# Altium PCB BauhallenUhr_Variante_3.PcbDoc (part 2 of 2)
Units mm, origin at the board's own origin, x right, y up, seen from the top; angles counter-clockwise.
Board outline 93.98 x 68.58 mm, 4 copper layers (Top Layer, Signal Layer 2, GND Layer 3, Bottom Layer), stack 1.54 mm thick; 120 components, 80 nets, 567 pads, 100 vias.
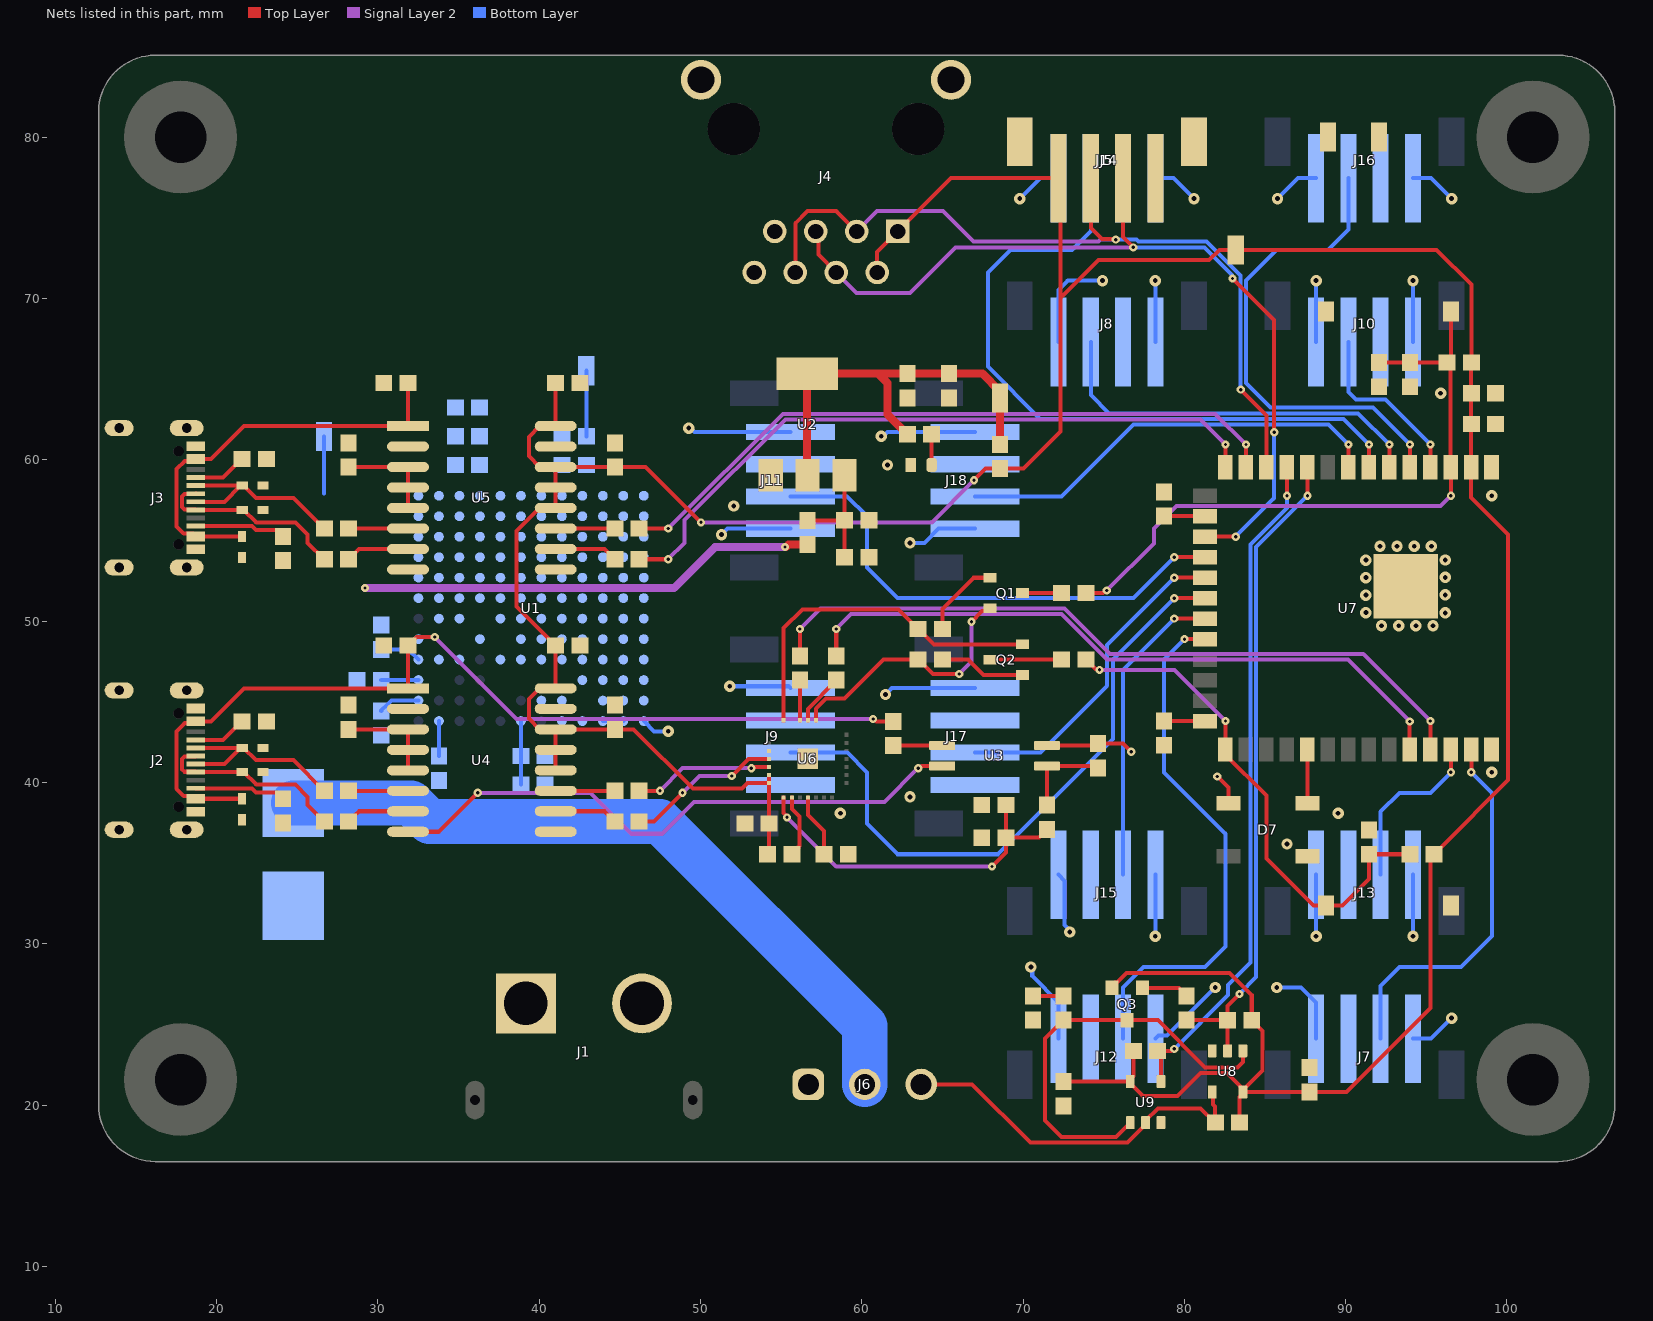
[diagram p4: the nets of this part, all layers, seen from the top]

## Part data
C1 C2 C3 C4 C5 C6 C7 C8 C9 C10 C11 C12 C13 C14 C15 C16 C17 C18 C19 C20 C21 C22 C23 C24 C25 C26 C27 C28 C29: library part Capacitor, "0603"
D1 D2 D3 D4 D5 D6: library part ESD_Protection_Diode, ComponentLink1Description=Supplier, ComponentLink1URL=https://www.digikey.com/en/products/detail/onsemi/ESD5B5-0ST1G/1792206
F1: library part Fuse, "FUSE BRD MNT 10A 125VAC/VDC SMD"
J1: library part PCB_Connector, "Socket, DC supply, male, PIN: 2.", Package=Package, Check_prices=https://www.snapeda.com/parts/XT60PW-M/AMASS/view-part/?ref=eda, MF=AMASS, MP=XT60PW-M, SnapEDA_Link=https://www.snapeda.com/parts/XT60PW-M/AMASS/view-part/?ref=snap
J2 J3: "USB - C - Port"
J4: library part RJ45, "Jack Modular Connector 8p8c (RJ45, Ethernet) 90Â° Angle (Right) Shielded Cat3.", Package=None, Check_prices=https://www.snapeda.com/parts/RJE091884511C/Amphenol/view-part/?ref=eda, MF="Amphenol ICC (Commercial Products)", MP=RJE091884511C, SnapEDA_Link=https://www.snapeda.com/parts/RJE091884511C/Amphenol/view-part/?ref=snap, System=Connector
J5: library part Connector_SMD_Small_Symbol, "CONN HEADER SMD 4POS 2MM.", ComponentLink1Description=Supplier, ComponentLink1URL=https://www.digikey.ch/en/products/detail/jst-sales-america-inc/B4B-PH-SM4-TB/926643
J6: library part Screw_Connector, "691214110003 Wurth Elektronik"
J7 J8 J9 J10 J11 J12 J13 J14 J15 J16 J17 J18: library part Connector_SMD, "CONN HEADER SMD 4POS 2MM.", ComponentLink1Description=Supplier, ComponentLink1URL=https://www.digikey.ch/en/products/detail/jst-sales-america-inc/B4B-PH-SM4-TB/926643
LED1: library part "LED_0603, GREEN", "LED 0603, Green, 3.2 V, 20 mA, 430 mcd"
MEC1 MEC2 MEC3 MEC4: "Mounting Hole for M3 Screw, plated to connect signal"
Q1 Q2: library part NPN_Bipolar_Transistor, "SS8050 SOT - 23.", ComponentLink1Description=Supplier, ComponentLink1URL=https://www.digikey.com/en/products/detail/guangdong-inmark-electronics-co-ltd/SS8050/28539054
Q3: library part PNP_Bipolar_Transistor, "Bipolar (BJT) Transistor PNP 25 V 500 mA 150MHz 300 mW Surface Mount SOT-23."
R1 R2 R3 R4 R5 R6 R7 R8 R9 R10 R11 R12 R13 R14 R15 R16 R17 R18 R19 R20 R21 R22 R23 R24 R25 R26 R27 R28 R29 R30 R31 R32 R33 R34 R35 R36 R37 R38 R39 R40: library part Resistor, "0603"
S1 S2: library part Button
TP1 TP2 TP3 TP4 TP5 TP6: "Prüfstecker und Messbuchsen EZ BoardWare S27 SMT Mini Test Terminal, Reel"
U1: library part DCDC_Converter, "Module DC-DC 1-OUT 0.6V to 5V 15A Automotive 133-Pin BGA Tray.", Package="BGA -133 Analog Devices", Availability="In Stock", Check_prices=https://www.snapeda.com/parts/LTM4627EY%23PBF/Analog+Devices/view-part/?ref=eda, MF="Analog Devices", MP=LTM4627EY#PBF, Price=None, Purchase-URL=https://pricing.snapeda.com/search/part/LTM4627EY#PBF/?ref=eda, SnapEDA_Link=https://www.snapeda.com/parts/LTM4627EY%23PBF/Analog+Devices/view-part/?ref=snap
U2: "LDO, 3.3V and 800mA.", ComponentLink1Description=Datasheet, ComponentLink1URL=chrome-extension://efaidnbmnnnibpcajpcglclefindmkaj/https://www.st.com/content/ccc/resource/technical/document/datasheet/99/3b/7d/91/91/51/4b/be/CD00000544.pdf/files/CD00000544.pdf/jcr:content/translations/en.CD00000544.pdf, ComponentLink2Description=Supplier, ComponentLink2URL=https://www.digikey.ch/en/products/detail/stmicroelectronics/LD1117S33CTR/585765
U3: library part Optocoupler, "Optoisolator Transistor Output 3750Vrms 1 Channel 4-SO."
U4 U5: library part USB_Digital_Isolator, "DGT ISOL 2500VRMS 2CH USB 16SOIC."
U6: "USB to UART bridge.", ComponentLink1Description=Datasheet, ComponentLink1URL=chrome-extension://efaidnbmnnnibpcajpcglclefindmkaj/https://www.silabs.com/documents/public/data-sheets/cp2102n-datasheet.pdf, ComponentLink2Description=Supplierlink, ComponentLink2URL=https://www.digikey.ch/en/products/detail/silicon-laboratories-inc/CP2102N-A02-GQFN28R/9863486?utm_source=findchips&utm_medium=aggregator&utm_campaign=buynow
U7: library part ESP32-S3-WROOM-2-N32R16V, "Bluetooth, WiFi 802.11b/g/n, Bluetooth v5.0 Transceiver Module 2.4GHz PCB Trace Surface Mount", Manufacturer="Espressif Systems", Supplier 1 Part Number=1965-ESP32-S3-WROOM-2-N32R16VCT-ND, Supplier 2 Part Number=356-SP32S3WM2N32R16V, Assembly Technology=SMD, ComponentLink1Description="Show Datasheet on SMS Drive", ComponentLink1URL="P:\Electronic Workshop\Datasheets (Refered in Libraries - Don't Change!)\ESP32-S3-WROOM-2-N32R16V_Digikey_1965-ESP32-S3-WROOM-2-N32R16VCT-ND.pdf", Latest Revision Date=17.10.2025, Latest Revision Made By="Simon Gimple", Latest Revision Note="New Part", Manufacturer Part Number=ESP32-S3-WROOM-2-N32R16V, Supplier 1=DigiKey, Supplier 2=Mouser
U8: library part Single_Bus_Buffer_Gate, "Single Bus Buffer Gate With 3-State Outputs, DBV0005A, LARGE T&R.", ComponentLink1Description=Supplier, ComponentLink1URL=https://www.digikey.com/en/products/detail/texas-instruments/SN74LVC1G126DBVR/385722
U9: library part Single_Bus_Buffer_Gate_Inverted, "Single Bus Buffer Gate With 3-State Outputs, DBV0005A, LARGE T&R.", ComponentLink1Description=Supplier

## Via types
v1: diameter 0.508, hole 0.203, Top Layer to Bottom Layer, 52 vias
v2: diameter 0.7, hole 0.3, Top Layer to Bottom Layer, 32 vias
v3: diameter 0.7, hole 0.3, Top Layer to Bottom Layer, tented top, 16 vias

## Nets (pads, with @x,y where several pads share a name; then routed paths per layer and width w, separated by ;. In a path a pad name is that pad's centre, name@x,y a point inside that pad or via, vN(x,y) a via of type N, cw(c..) or ccw(c..) an arc to the next point about the centre after c; other vN are vias at no path point)
+3.3V: C18.1 C19.1 C20.2 C21.2 C22.2 C23.2 C24.2 C28.2 C29.2 J4.1 J4.2 J5.1 Q3.2 R6.2 R20.2 R27.2 R32.2 R38.2 R39.2 R40.2 TP6.1 U4.12 U4.13 U4.14 U4.16 U5.12 U5.13 U5.14 U5.16 U6.6 U6.7 U7.2 U8.5 U9.5 | length 239
  Top Layer w0.25: U4.12@41.027,40.765 U4.13@41.027,42.035 U4.14@41.027,43.305 ; C21.2@41.027,64.77 U5.16@41.027,62.105 40.039,62.105 39.37,61.436 39.37,60.234 40.039,59.565 U5.14@41.027,59.565 ; v1(50.038,56.134) 46.607,59.565 C19.1@44.704,59.565 U5.14@41.027,59.565 ; R20.2@54.165,35.56 54.265,35.66 C22.2@54.265,37.46 U6.7@54.265,39.967 ; U6.6@54.265,40.467 U6.7@54.265,39.967 ; J4.2@60.96,71.628 60.96,72.898 J4.1@62.23,74.168 65.532,77.47 J5.1@72.2,77.47 72.336,77.334 72.336,70.05 ; v1(66.956,58.744) 67.672,59.46 R6.2@68.58,59.46 70.02,59.46 72.336,61.776 72.336,70.05 ; C29.2@72.517,21.463 72.527,21.473 U9.5@76.647,21.473 ; Q3.2@75.377,27.273 75.702,27.598 75.829,27.598 76.425,28.194 82.804,28.194 84.177,26.821 R38.2@84.177,25.273 84.202,25.273 84.577,24.898 84.577,24.873 84.836,24.614 84.836,22.157 U8.5@83.627,20.948 ; R40.2@76.847,23.368 76.847,21.798 76.647,21.598 U9.5@76.647,21.473 ; R39.2@83.427,18.923 83.427,20.498 83.627,20.698 U8.5@83.627,20.823 ; C28.2@87.752,20.823 U8.5@83.627,20.823 ; C28.2@87.757,20.828 90.043,20.828 95.25,26.035 95.25,35.33 R32.2@95.48,35.56 ; R32.2@95.505,35.56 95.88,35.935 95.88,35.96 100.076,40.156 100.076,55.372 97.77,57.678 U7.2@97.77,59.55 97.77,66.02 R27.2@97.79,66.04 97.79,70.866 95.631,73.025 TP6.1@83.185,73.025 82.169,73.025 81.534,72.39 74.676,72.39 72.336,70.05 ; U4.14@41.027,43.305 40.039,43.305 39.37,43.974 39.37,45.176 40.039,45.845 U4.16@41.027,45.845 C20.2@41.027,48.51 41.002,48.51 40.627,48.885 40.627,48.91 38.608,50.929 38.608,55.594 40.039,57.025 U5.12@41.027,57.025 U5.13@41.027,58.295 U5.14@41.027,59.565 ; U4.14@41.027,43.305 C18.1@44.704,43.305 45.849,43.305 49.53,39.624 52.578,39.624 52.921,39.967 U6.7@54.265,39.967 ; U9.5@76.647,21.473 76.647,21.348 77.421,20.574 79.563,20.574 80.991,22.002 82.646,22.002 83.477,21.171 83.477,21.098 83.554,21.021 83.627,21.021 U8.5@83.627,20.948 ; U8.5@83.627,20.823 U8.5@83.627,20.948
  Signal Layer 2 w0.25: v1(50.038,56.134) 64.346,56.134 v1(66.956,58.744)
+5V: C1.2 C8.2 C10.2 D7.1 J7.2 J8.2 J9.2 J10.2 J11.2 J12.2 J13.2 J14.2 J15.2 J16.2 J17.2 J18.2 R18.2 TP3.1 U1.J1 U1.J2 U1.J3 U1.J4 U1.J5 U1.J6 U1.J7 U1.J8 U1.J9 U1.J10 U1.J12 U1.K1 U1.K2 U1.K3 U1.K4 U1.K5 U1.K6 U1.K7 U1.K8 U1.K9 U1.K10 U1.K11 U1.L1 U1.L2 U1.L3 U1.L4 U1.L5 U1.L6 U1.L7 U1.L8 U1.L9 U1.L10 U1.L11 U1.M1 U1.M2 U1.M3 U1.M4 U1.M5 U1.M6 U1.M7 U1.M8 U1.M9 U1.M10 U1.M11 U3.4 | length 11.5
  Top Layer w0.25: U3.4@71.482,42.299 74.542,42.299 R18.2@74.657,42.414 76.204,42.414 v1(76.708,41.91) ; v1(82.042,40.386) 82.73,39.698 D7.1@82.73,38.735
  Bottom Layer w0.25: C8.2@42.926,61.468 TP3.1@42.926,65.532
+12V: C9.2 C11.2 C12.2 F1.2 J6.2 R2.1 R3.2 TP1.1 U1.A1 U1.A2 U1.A3 U1.A4 U1.A5 U1.A6 U1.B1 U1.B2 U1.B3 U1.B4 U1.B5 U1.B6 U1.C1 U1.C2 U1.C3 U1.C4 U1.C5 U1.C6 | length 76.9
  Top Layer w0.5: v1(55.245,54.61) 55.315,54.61 55.454,54.749 R2.1@56.642,54.749
  Signal Layer 2 w0.5: v1(29.21,52.07) 48.376,52.07 50.916,54.61 v1(55.245,54.61)
  Bottom Layer w0.25: 26.67,57.912 TP1.1@26.67,61.468
  Bottom Layer w2.8: F1.2@24.765,38.735 32.053,38.735 33.196,37.592 47.498,37.592 60.187,24.903 J6.2@60.187,21.29
D1: J7.3 U7.39 | length 23.5
  Top Layer w0.25: U7.39@97.77,42.05 97.79,42.03 v1(97.79,40.64)
  Bottom Layer w0.25: J7.3@92.17,24.13 92.17,27.4 93.345,28.575 97.155,28.575 99.06,30.48 99.06,39.37 v1(97.79,40.64)
D2: J13.3 U7.38 | length 10.7
  Top Layer w0.25: U7.38@96.5,42.05 96.52,42.03 v1(96.52,40.64)
  Bottom Layer w0.25: J13.3@92.17,34.29 92.17,38.195 93.345,39.37 95.25,39.37 v1(96.52,40.64)
D3: J10.3 U7.4 | length 10.9
  Top Layer w0.25: U7.4@95.23,59.55 95.25,59.57 v1(95.25,60.96)
  Bottom Layer w0.25: J10.3@90.17,67.31 90.17,64.225 90.641,63.754 92.456,63.754 v1(95.25,60.96)
D4: J16.3 U7.5 | length 30.3
  Top Layer w0.25: U7.5@93.96,59.55 93.98,59.57 v1(93.98,60.96)
  Bottom Layer w0.25: J16.3@90.17,77.47 90.17,74.295 88.9,73.025 85.725,73.025 83.82,71.12 83.82,64.77 85.344,63.246 91.694,63.246 v1(93.98,60.96)
D5: J8.3 U7.6 | length 24.5
  Top Layer w0.25: U7.6@92.69,59.55 92.71,59.57 v1(92.71,60.96)
  Bottom Layer w0.25: J8.3@74.2,67.31 74.2,64.04 75.344,62.896 90.774,62.896 v1(92.71,60.96)
D6: J14.3 U7.7 | length 43.6
  Top Layer w0.25: U7.7@91.42,59.55 91.44,59.57 v1(91.44,60.96)
  Bottom Layer w0.25: J14.3@74.2,77.47 74.2,74.2 73.025,73.025 69.215,73.025 67.818,71.628 67.818,65.786 71.058,62.546 89.854,62.546 v1(91.44,60.96)
D7: J11.3 U7.18 | length 31.2
  Top Layer w0.25: v1(79.375,53.975) U7.18@81.28,53.975
  Bottom Layer w0.25: J11.3@55.59,57.74 59.1,57.74 60.325,56.515 60.325,53.34 62.23,51.435 76.835,51.435 v1(79.375,53.975)
D8: J17.3 U7.19 | length 20.2
  Top Layer w0.25: v1(79.375,52.705) U7.19@81.28,52.705
  Bottom Layer w0.25: J17.3@67.02,41.86 71.07,41.86 75.215,46.005 75.215,48.545 v1(79.375,52.705)
D9: J9.3 U7.20 | length 39.6
  Top Layer w0.25: v1(79.375,51.435) U7.20@81.28,51.435
  Bottom Layer w0.25: J9.3@55.59,41.86 59.105,41.86 60.325,40.64 60.325,37.465 62.23,35.56 68.434,35.56 75.565,42.691 75.565,47.625 v1(79.375,51.435)
D10: J15.3 U7.21 | length 19.1
  Top Layer w0.25: v1(79.375,50.165) U7.21@81.28,50.165
  Bottom Layer w0.25: J15.3@76.2,34.29 76.2,46.99 v1(79.375,50.165)
D11: J12.3 U7.22 | length 33
  Top Layer w0.25: v1(80.01,48.895) U7.22@81.28,48.895
  Bottom Layer w0.25: J12.3@76.2,24.13 76.2,27.305 77.47,28.575 81.28,28.575 82.55,29.845 82.55,36.83 78.74,40.64 78.74,47.625 v1(80.01,48.895)
D12: J18.3 U7.8 | length 26.9
  Top Layer w0.25: U7.8@90.15,59.55 90.17,59.57 v1(90.17,60.96)
  Bottom Layer w0.25: J18.3@67.02,57.74 72.379,57.74 76.835,62.196 88.934,62.196 v1(90.17,60.96)
DATA: J6.3 R39.1 U8.4 U9.2 | length 23.1
  Top Layer w0.25: J6.3@63.687,21.29 66.848,21.29 70.454,17.684 76.483,17.684 77.597,18.798 U9.2@77.597,18.923 77.597,19.048 78.361,19.812 81.013,19.812 81.902,18.923 81.902,19.911 81.764,20.048 81.764,20.786 U8.4@81.727,20.823
DTR: Q2.2 R28.2 U6.28 | length 21.9
  Top Layer w0.25: U6.28@55.165,43.867 55.165,49.577 56.328,50.74 62.29,50.74 63.1,49.93 63.1,49.905 63.475,49.53 R28.2@63.5,49.53 63.525,49.53 64.48,48.575 Q2.2@69.965,48.575
EN: C25.2 C26.2 R27.1 R30.2 S1.2 U7.3 | length 41.5
  Top Layer w0.25: R30.2@73.89,51.75 74.95,51.75 75.114,51.914 v1(75.184,51.914) ; C25.2@92.075,66.04 C26.2@93.98,66.04 R27.1@96.29,66.04 ; v1(96.52,57.785) 96.52,59.53 U7.3@96.5,59.55 96.5,65.83 R27.1@96.29,66.04 ; S1.2@96.52,69.215 96.52,66.27 R27.1@96.29,66.04
  Signal Layer 2 w0.25: v1(75.184,51.914) 78.105,54.835 78.105,55.753 79.502,57.15 95.885,57.15 v1(96.52,57.785)
GND: C2.1 C3.1 C4.1 C5.1 C6.1 C7.1 C8.1 C9.1 C10.1 C11.1 C12.1 C15.2 C18.2 C19.2 C20.1 C21.1 C22.1 C23.1 C24.1 C25.1 C26.1 C27.1 C28.1 C29.1 D7.3 J1.2 J4.7 J4.8 J4.SH1 J4.SH2 J5.4 J5.SH1 J5.SH2 J6.1 J7.1 J7.4 J8.1 J8.4 J9.1 J9.4 J10.1 J10.4 J11.1 J11.4 J12.1 J12.4 J13.1 J13.4 J14.1 J14.4 J15.1 J15.4 J16.1 J16.4 J17.1 J17.4 J18.1 J18.4 LED1.K R1.1 R4.1 R13.1 R26.1 R33.2 R34.2 R37.1 S1.1 S2.1 TP4.1 TP5.1 U1.A8 U1.B7 U1.B9 U1.C7 U1.C9 U1.D1 U1.D2 U1.D3 U1.D4 U1.D5 U1.D6 U1.D8 U1.E1 U1.E2 U1.E3 U1.E4 U1.E5 U1.E6 U1.E7 U1.E9 U1.F1 U1.F2 U1.F3 U1.F4 U1.F5 U1.F6 U1.F7 U1.F8 U1.F9 U1.G1 U1.G2 U1.G3 U1.G4 U1.G5 U1.G6 U1.G7 U1.G8 U1.G9 U1.G11 U1.H1 U1.H2 U1.H3 U1.H4 U1.H5 U1.H6 U1.H7 U1.H8 U1.H9 U1.H11 U1.H12 U1.M12 U2.1 U4.9 U4.15 U5.9 U5.15 U6.3 U6.29 U7.1 U7.40 U7.41 U8.3 U9.3 | length 95.3
  Bottom Layer w0.25: U1.M12@46.49,43.815 47.125,43.18 v2(48.006,43.18) ; v2(49.276,61.976) 49.398,61.976 49.634,61.74 J11.1@55.59,61.74 ; v2(51.308,55.372) 51.311,55.372 51.679,55.74 J11.4@55.59,55.74 ; v2(51.816,45.974) 55.476,45.974 J9.1@55.59,45.86 ; v2(61.214,61.468) 61.336,61.468 61.608,61.74 J18.1@67.02,61.74 ; v2(61.468,45.466) 61.862,45.86 J17.1@67.02,45.86 ; v2(62.992,54.864) 63.894,54.864 64.77,55.74 J18.4@67.02,55.74 ; v2(69.8,76.2) 71.07,77.47 J14.4@72.2,77.47 ; v2(70.485,28.575) 70.571,28.489 70.571,28.009 72.2,26.38 J12.1@72.2,24.13 ; J15.1@72.2,34.29 72.575,33.915 72.575,31.179 72.898,30.856 v2(72.898,30.734) ; J8.4@72.2,67.31 72.2,70.548 72.772,71.12 v2(74.93,71.12) ; J12.4@78.2,24.13 78.389,24.319 78.929,24.319 v2(81.915,27.305) ; v2(78.2,30.48) J15.4@78.2,34.29 ; J8.1@78.2,67.31 v2(78.2,71.12) ; J14.1@78.2,77.47 79.33,77.47 v2(80.6,76.2) ; v2(85.725,27.305) 87.245,27.305 88.17,26.38 J7.1@88.17,24.13 ; v2(85.77,76.2) 87.04,77.47 J16.4@88.17,77.47 ; v2(88.17,30.48) J13.1@88.17,34.29 ; J10.4@88.17,67.31 v2(88.17,71.12) ; J7.4@94.17,24.13 95.3,24.13 v2(96.57,25.4) ; v2(94.17,30.48) J13.4@94.17,34.29 ; J10.1@94.17,67.31 v2(94.17,71.12) ; J16.1@94.17,77.47 95.3,77.47 v2(96.57,76.2)
  other v2: 86.36,36.195 58.674,38.1 89.535,38.1 62.992,39.116 99.06,40.64 52.07,57.15 99.06,57.785 61.595,59.69 95.885,64.135
  other v3: 92.226,49.723 93.288,49.723 94.35,49.723 95.412,49.723 91.25,50.539 96.175,50.523 91.25,51.623 96.175,51.639 91.25,52.707 96.175,52.723 91.25,53.791 96.175,53.807 92.125,54.648 93.187,54.648 94.249,54.648 95.311,54.648
GND_A: C13.1 C16.2 D1.A D3.A D5.A J2.A1_B12 J2.B1_A12 J2.SH1 J2.SH2 J2.SH3 J2.SH4 R7.2 R8.2 U3.2 U4.2 U4.8 | length 36.9
  Top Layer w0.25: U4.8@31.871,36.955 33.78,36.955 v1(36.195,39.37) ; v1(63.5,40.894) 63.57,40.894 63.705,41.029 U3.2@64.982,41.029
  Signal Layer 2 w0.25: v1(36.195,39.37) 43.18,39.37 45.72,36.83 47.625,36.83 49.6,38.805 61.411,38.805 v1(63.5,40.894)
GND_B: C14.1 C17.2 D2.A D4.A D6.A J3.A1_B12 J3.B1_A12 J3.SH1 J3.SH2 J3.SH3 J3.SH4 R9.2 R10.2 U5.2 U5.8
GPIO0: C27.2 R31.2 R32.1 S2.2 U7.27 | length 32.1
  Top Layer w0.25: R31.2@73.89,47.625 73.915,47.625 74.501,47.039 74.687,47.039 v1(74.736,46.99) ; v1(82.55,43.815) 82.55,42.07 U7.27@82.53,42.05 82.53,41.75 85.09,39.19 85.09,35.306 88.011,32.385 S2.2@88.77,32.385 89.789,32.385 91.44,34.036 C27.2@91.44,35.56 R32.1@93.98,35.56
  Signal Layer 2 w0.25: v1(74.736,46.99) 79.375,46.99 v1(82.55,43.815)
GPIO19: D4.K J3.A7 J3.B7 R16.1 | length 12.3
  Top Layer w0.25: J3.A7@18.725,57.41 20.49,57.41 21.49,58.41 D4.K@21.59,58.41 ; J3.B7@18.725,58.41 D4.K@21.59,58.41 ; R16.1@26.694,55.755 26.669,55.755 24.766,57.658 22.442,57.658 21.69,58.41 D4.K@21.59,58.41
GPIO19_2: R24.2 U7.13 | length 42.8
  Top Layer w0.25: R24.2@46.204,55.755 v1(48.006,55.755) ; U7.13@83.8,59.55 83.82,59.57 v1(83.82,60.96)
  Signal Layer 2 w0.25: v1(48.006,55.755) 55.116,62.865 81.915,62.865 v1(83.82,60.96)
GPIO20: D6.K J3.A6 J3.B6 R17.1 | length 12
  Top Layer w0.25: J3.A6@18.725,57.91 18.7,57.885 18.022,57.885 17.876,57.739 17.876,57.081 18.022,56.935 18.7,56.935 J3.B6@18.725,56.91 D6.K@21.59,56.91 21.69,56.91 22.466,56.134 24.892,56.134 25.654,55.372 25.654,54.863 26.669,53.848 R17.1@26.694,53.848
GPIO20_2: R25.2 U7.14 | length 42.8
  Top Layer w0.25: R25.2@46.204,53.848 v1(48.006,53.848) ; U7.14@82.53,59.55 82.55,59.57 v1(82.55,60.96)
  Signal Layer 2 w0.25: v1(48.006,53.848) 49.022,54.864 49.022,56.276 55.261,62.515 80.995,62.515 v1(82.55,60.96)
NetC1_1: C1.1 R1.2 U1.F12 | length 3.9
  Bottom Layer w0.25: R1.2@38.87,39.878 C1.1@38.87,41.644 U1.F12@38.87,43.815
NetC2_2: C2.2 C3.2 R2.2 U2.3 | length 7.4
  Top Layer w0.25: R2.2@56.642,56.249 58.928,56.249 C2.2@58.94,56.261 ; U2.3@58.928,59.055 58.94,59.043 C2.2@58.94,56.261 ; C3.2@58.94,53.975 C2.2@58.94,56.261
NetC4_2: C4.2 C6.2 R5.2 R6.1 TP2.1 U2.2 U2.4 | length 26.6
  Top Layer w0.5: U2.2@56.642,59.055 56.617,59.08 U2.4@56.617,65.354 61.011,65.354 ; R5.2@62.83,61.595 62.805,61.595 62.555,61.845 62.555,61.87 61.595,62.83 61.595,64.77 61.011,65.354 ; R6.1@68.58,60.96 TP2.1@68.58,63.854 68.58,64.254 67.48,65.354 C6.2@65.405,65.354 C4.2@62.83,65.354 61.011,65.354
NetC5_2: C5.2 U1.A9 | length 2.6
  Bottom Layer w0.25: C5.2@30.214,48.26 31.885,48.26 U1.A9@32.52,47.625
NetC7_2: C7.2 U1.A11 | length 2.6
  Bottom Layer w0.25: C7.2@30.214,44.438 30.214,44.463 30.589,44.838 30.614,44.838 30.861,45.085 U1.A11@32.52,45.085
NetC15_1: C15.1 R12.1 R13.2 U6.8 | length 22.2
  Top Layer w0.25: U6.8@55.165,39.067 55.165,38.123 55.372,37.916 v1(55.372,37.846) ; v1(68.072,34.798) 68.942,35.668 R13.2@68.942,36.584 ; C15.1@68.942,38.604 R13.2@68.942,36.584 ; R12.1@71.482,37.104 71.482,37.079 70.987,36.584 R13.2@68.942,36.584
  Signal Layer 2 w0.25: v1(55.372,37.846) 58.42,34.798 v1(68.072,34.798)
NetC16_1: C16.1 U4.3 U4.4 U4.5 | length 6.2
  Top Layer w0.25: C16.1@28.194,43.305 U4.3@31.871,43.305 U4.5@31.871,40.765
NetC17_1: C17.1 U5.3 U5.4 U5.5 | length 6.2
  Top Layer w0.25: C17.1@28.194,59.565 U5.3@31.871,59.565 U5.5@31.871,57.025
NetD7_4: D7.4 U7.31 | length 3.3
  Top Layer w0.25: U7.31@87.61,42.05 87.63,42.03 D7.4@87.63,38.735
NetF1_1: F1.1 J1.1
NetJ2_A5: J2.A5 R8.1 | length 3.3
  Top Layer w0.25: J2.A5@18.725,42.65 20.415,42.65 21.565,43.8 R8.1@21.59,43.8
NetJ2_B5: J2.B5 R7.1 | length 5.7
  Top Layer w0.25: J2.B5@18.725,39.65 22.195,39.65 22.445,39.4 23.755,39.4 24.13,39.025 R7.1@24.13,39
NetJ3_A5: J3.A5 R10.1 | length 3.3
  Top Layer w0.25: J3.A5@18.725,58.91 20.415,58.91 21.565,60.06 R10.1@21.59,60.06
NetJ3_B5: J3.B5 R9.1 | length 5.7
  Top Layer w0.25: J3.B5@18.725,55.91 22.195,55.91 22.445,55.66 23.755,55.66 24.13,55.285 R9.1@24.13,55.26
NetLED1_A: LED1.A R5.1 | length 1.9
  Top Layer w0.25: LED1.A@64.33,59.69 R5.1@64.33,61.595
NetQ1_1: Q1.1 R28.1 | length 5
  Top Layer w0.25: R28.1@65,49.53 65,50.776 66.924,52.7 Q1.1@67.945,52.7
NetQ1_3: Q1.3 R30.1 | length 2.4
  Top Layer w0.25: Q1.3@69.965,51.75 R30.1@72.39,51.75
NetQ2_1: Q2.1 R29.1 | length 5.4
  Top Layer w0.25: R29.1@65,47.625 66.602,47.625 67.552,46.675 Q2.1@69.965,46.675
NetQ2_3: Q2.3 R31.1 | length 4.4
  Top Layer w0.25: Q2.3@67.945,47.625 R31.1@72.39,47.625
NetQ3_1: Q3.1 R35.1 | length 3
  Top Layer w0.25: Q3.1@77.404,27.273 79.662,27.273 80.137,26.798 R35.1@80.137,26.773
NetR3_1: R3.1 U1.A10 | length 2.3
  Bottom Layer w0.25: R3.1@30.214,46.355 U1.A10@32.52,46.355
NetR4_2: R4.2 U1.B12 | length 2.2
  Bottom Layer w0.25: R4.2@33.79,41.644 U1.B12@33.79,43.815
NetR11_1: R11.1 U3.1 | length 3
  Top Layer w0.25: R11.1@61.957,42.299 U3.1@64.982,42.299
NetR12_2: R12.2 R18.1 U3.3 | length 5.6
  Top Layer w0.25: R12.2@71.482,38.604 U3.3@71.482,41.029 74.542,41.029 R18.1@74.657,40.914
NetR14_2: R14.2 U4.6 | length 3.7
  Top Layer w0.25: R14.2@28.194,39.495 U4.6@31.871,39.495
NetR15_2: R15.2 U4.7 | length 4
  Top Layer w0.25: R15.2@28.194,37.588 28.219,37.588 28.594,37.963 28.594,37.988 28.831,38.225 U4.7@31.871,38.225
NetR16_2: R16.2 U5.6 | length 3.7
  Top Layer w0.25: R16.2@28.194,55.755 U5.6@31.871,55.755
NetR17_2: R17.2 U5.7 | length 4
  Top Layer w0.25: R17.2@28.194,53.848 28.219,53.848 28.594,54.223 28.594,54.248 28.831,54.485 U5.7@31.871,54.485
NetR19_2: R19.2 U6.25 | length 3.2
  Top Layer w0.25: U6.25@56.665,43.867 56.665,44.575 58.42,46.33 R19.2@58.42,46.355
NetR20_1: R20.1 U6.9 | length 3.9
  Top Layer w0.25: R20.1@55.665,35.56 55.69,35.56 56.065,35.935 56.065,36.012 56.134,36.081 56.134,37.896 55.665,38.365 U6.9@55.665,39.067
NetR21_2: R21.2 U6.26 | length 2.5
  Top Layer w0.25: U6.26@56.165,43.867 R21.2@56.165,46.355
NetR22_1: R22.1 U4.11 | length 3.7
  Top Layer w0.25: U4.11@41.027,39.495 R22.1@44.704,39.495
NetR23_1: R23.1 U4.10 | length 3.9
  Top Layer w0.25: U4.10@41.027,38.225 44.042,38.225 44.679,37.588 R23.1@44.704,37.588
NetR24_1: R24.1 U5.11 | length 3.7
  Top Layer w0.25: U5.11@41.027,55.755 R24.1@44.704,55.755
NetR25_1: R25.1 U5.10 | length 3.9
  Top Layer w0.25: U5.10@41.027,54.485 44.042,54.485 44.679,53.848 R25.1@44.704,53.848
NetR26_2: R26.2 U6.11 | length 3.9
  Top Layer w0.25: U6.11@56.665,39.067 56.665,38.001 57.665,37.001 R26.2@57.665,35.56
NetR33_1: R33.1 U7.26 | length 2.5
  Top Layer w0.25: R33.1@78.74,43.815 U7.26@81.28,43.815
NetR34_1: R34.1 U7.16 | length 2.5
  Top Layer w0.25: R34.1@78.74,56.515 U7.16@81.28,56.515
NetR36_1: R36.1 R37.2 | length 1.9
  Top Layer w0.25: R37.2@70.612,26.773 R36.1@72.517,26.773
RTS: Q1.2 R29.2 U6.24 | length 16.3
  Top Layer w0.25: U6.24@57.165,43.867 57.165,44.58 57.797,45.212 58.928,45.212 61.341,47.625 R29.2@63.5,47.625 63.525,47.625 64.414,46.736 v1(66.04,46.736) ; v1(66.802,49.971) 67.456,50.625 67.77,50.625 Q1.2@67.945,50.8
  Signal Layer 2 w0.25: v1(66.04,46.736) 66.802,47.498 v1(66.802,49.971)
SCL: J4.4 J4.5 J5.3 U7.17 | length 54.8
  Top Layer w0.25: J4.5@57.15,74.168 57.311,74.007 57.311,72.737 J4.4@58.42,71.628 ; J5.3@76.2,77.47 76.2,73.816 v1(76.835,73.181) ; U7.17@81.28,55.245 v1(83.185,55.245) ; v1(82.991,71.247) 85.569,68.669 v1(85.569,61.717)
  Signal Layer 2 w0.25: J4.4@58.42,71.628 59.69,70.358 62.992,70.358 65.815,73.181 v1(76.835,73.181)
  Bottom Layer w0.25: v1(76.835,73.181) 81.239,73.181 82.942,71.479 82.942,71.296 v1(82.991,71.247) ; v1(83.185,55.245) 85.569,57.629 v1(85.569,61.717)
SDA: J4.3 J4.6 J5.2 U7.12 | length 51.3
  Top Layer w0.25: J4.6@55.88,71.628 55.88,74.676 56.642,75.438 58.42,75.438 J4.3@59.69,74.168 ; J5.2@74.2,77.47 74.2,74.39 74.881,73.709 75.698,73.709 v1(75.747,73.66) ; v1(83.496,64.362) 85.09,62.768 85.09,59.57 U7.12@85.07,59.55
  Signal Layer 2 w0.25: J4.3@59.69,74.168 60.96,75.438 65.024,75.438 66.931,73.531 74.684,73.531 74.813,73.66 v1(75.747,73.66)
  Bottom Layer w0.25: v1(75.747,73.66) 77.033,73.66 77.162,73.531 81.384,73.531 83.47,71.445 83.47,64.388 v1(83.496,64.362)
TX_EN: Q3.3 R36.2 U8.1 U9.1 | length 25.9
  Top Layer w0.25: U9.1@76.647,18.923 75.758,18.034 72.39,18.034 71.374,19.05 71.374,24.13 72.117,24.873 72.142,24.873 72.517,25.248 R36.2@72.517,25.273 78.359,25.273 81.28,22.352 83.285,22.352 83.627,22.694 U8.1@83.627,23.373
U0_RXD: R19.1 U7.36 | length 42.1
  Top Layer w0.25: R19.1@58.42,47.855 v1(58.42,49.53) ; U7.36@93.96,42.05 93.96,43.775 v1(93.973,43.788)
  Signal Layer 2 w0.25: v1(58.42,49.53) 59.34,50.45 72.39,50.45 75.215,47.625 90.135,47.625 v1(93.973,43.788)
U0_TXD: R21.1 U7.37 | length 46
  Top Layer w0.25: R21.1@56.165,47.855 v1(56.165,49.53) ; U7.37@95.23,42.05 95.25,42.07 v1(95.25,43.815)
  Signal Layer 2 w0.25: v1(56.165,49.53) 57.435,50.8 72.57,50.8 75.395,47.975 91.09,47.975 v1(95.25,43.815)
U1_RXD: R40.1 U7.11 U9.4 | length 42
  Top Layer w0.25: U9.4@78.547,21.473 78.547,23.168 R40.1@78.347,23.368 79.178,23.368 79.305,23.495 v1(79.375,23.495) ; U7.11@86.34,59.55 86.36,59.53 v1(86.36,57.785)
  Bottom Layer w0.25: v1(79.375,23.495) 82.706,26.826 82.706,27.461 84.105,28.86 84.105,54.755 86.36,57.01 v1(86.36,57.785)
U1_TXD: R35.2 R38.1 U7.10 U8.2 | length 40.8
  Top Layer w0.25: R35.2@80.137,25.273 R38.1@82.677,25.273 ; U8.2@82.677,23.373 R38.1@82.677,25.273 ; v1(83.418,26.903) 82.677,26.162 R38.1@82.677,25.273 ; U7.10@87.61,59.55 87.63,59.53 v1(87.63,57.785)
  Bottom Layer w0.25: v1(83.418,26.903) 84.455,27.94 84.455,54.61 v1(87.63,57.785)
USB_DN: D3.K J2.A7 J2.B7 R14.1 | length 12.3
  Top Layer w0.25: J2.A7@18.725,41.15 20.49,41.15 21.49,42.15 D3.K@21.59,42.15 ; J2.B7@18.725,42.15 D3.K@21.59,42.15 ; R14.1@26.694,39.495 26.669,39.495 24.766,41.398 22.442,41.398 21.69,42.15 D3.K@21.59,42.15
USB_DN_2: R22.2 U6.5 | length 8.7
  Top Layer w0.25: R22.2@46.204,39.495 v1(47.498,39.495) ; v1(53.16,40.894) 53.229,40.894 53.302,40.967 U6.5@54.265,40.967
  Signal Layer 2 w0.25: v1(47.498,39.495) 48.897,40.894 v1@53.163,40.894
USB_DP: D5.K J2.A6 J2.B6 R15.1 | length 12
  Top Layer w0.25: J2.A6@18.725,41.65 18.7,41.625 18.022,41.625 17.876,41.479 17.876,40.821 18.022,40.675 18.7,40.675 J2.B6@18.725,40.65 D5.K@21.59,40.65 21.69,40.65 22.466,39.874 24.892,39.874 25.654,39.112 25.654,38.603 26.669,37.588 R15.1@26.694,37.588
USB_DP_2: R23.2 U6.4 | length 9.7
  Top Layer w0.25: R23.2@46.204,37.588 46.208,37.592 47.117,37.592 v1(48.895,39.37) ; v1(51.943,40.415) 52.995,41.467 U6.4@54.265,41.467
  Signal Layer 2 w0.25: v1(48.895,39.37) 49.94,40.415 v1(51.943,40.415)
VBUS_A: C13.2 D1.K J2.A4_B9 J2.B4_A9 R11.2 U4.1 | length 58.5
  Top Layer w0.25: D1.K@21.59,39 J2.B4_A9@18.725,39 18.55,39.175 17.971,39.175 17.526,39.62 17.526,43.176 18.034,43.684 18.609,43.684 J2.A4_B9@18.725,43.8 19.674,43.8 21.719,45.845 U4.1@31.871,45.845 C13.2@31.871,48.51 31.896,48.51 32.408,49.022 v1(33.528,49.022) ; v1(60.706,43.942) 60.776,43.942 60.919,43.799 R11.2@61.957,43.799
  Signal Layer 2 w0.25: v1(33.528,49.022) 38.608,43.942 v1(60.706,43.942)
VBUS_B: C14.2 D2.K J3.A4_B9 J3.B4_A9 U5.1 | length 26
  Top Layer w0.25: D2.K@21.59,55.26 J3.B4_A9@18.725,55.26 18.55,55.435 17.971,55.435 17.526,55.88 17.526,59.436 18.034,59.944 18.609,59.944 J3.A4_B9@18.725,60.06 19.674,60.06 21.719,62.105 U5.1@31.871,62.105 C14.2@31.871,64.77
VOUT_LCL: U1.K12 U1.L12 | length 1.3
  Bottom Layer w0.25: U1.K12@43.95,43.815 U1.L12@45.22,43.815
pads on no net: D7.2 J1.SH1 J1.SH2 J2. J2.A8 J2.B8 J3. J3.A8 J3.B8 J4. J7.SH1 J7.SH2 J8.SH1 J8.SH2 J9.SH1 J9.SH2 J10.SH1 J10.SH2 J11.SH1 J11.SH2 J12.SH1 J12.SH2 J13.SH1 J13.SH2 J14.SH1 J14.SH2 J15.SH1 J15.SH2 J16.SH1 J16.SH2 J17.SH1 J17.SH2 J18.SH1 J18.SH2 MEC1.1 MEC2.1 MEC3.1 MEC4.1 U1.A7 U1.A12 U1.B11 U1.C10 U1.C11 U1.C12 U1.D9 U1.D10 U1.D11 U1.D12 U1.E12 U1.F11 U1.G12 U6.1 U6.2 U6.10 U6.12 U6.13 U6.14 U6.15 U6.16 U6.17 U6.18 U6.19 U6.20 U6.21 U6.22 U6.23 U6.27 U7.9 U7.15 U7.23 U7.24 U7.25 U7.28 U7.29 U7.30 U7.32 U7.33 U7.34 U7.35

## Polygon pours and split planes (outlines as drawn)
+5V on Bottom Layer "NONET_L-01_P-001" (solid, pour order 51): 39.624,43.18 42.164,43.18 42.164,62.23 44.45,62.23 44.45,85.09 106.68,85.09 106.68,16.51 69.85,16.51 69.85,40.64 42.672,40.64 39.624,40.64
NetF1_1 on Bottom Layer "NONET_L-01_P-001" (solid, pour order 45): 42.545,24.13 42.545,35.56 20.955,35.56 20.955,24.13
+12V on Bottom Layer "NONET_L-01_P-001" (solid, pour order 28): 20.955,35.56 29.464,35.56 29.464,50.8 35.56,50.8 35.56,64.135 33.655,64.135 33.655,59.055 20.955,59.055
GND on Bottom Layer "NONET_L-01_P-001" (solid, pour order 52): 106.68,85.09 106.68,16.51 12.7,16.51 12.7,85.09
GND_A on Top Layer "NONET_L-01_P-001" (solid, pour order 53): 12.7,49.53 36.195,49.53 36.195,32.385 12.7,32.385
GND_B on Top Layer "NONET_L-01_P-001" (solid, pour order 50): 12.7,67.945 36.195,67.945 36.195,50.8 12.7,50.8
GND on Top Layer "NONET_L-01_P-001" (solid, pour order 54): 106.68,85.09 106.68,16.51 12.7,16.51 12.7,85.09
GND on GND Layer 3 "NONET_L-01_P-001" (solid, pour order 27): 106.68,85.09 106.68,16.51 12.7,16.51 12.7,85.09
GND on Signal Layer 2 "NONET_L-01_P-001" (solid, pour order 26): 106.68,85.09 106.68,16.51 12.7,16.51 12.7,85.09

## Silkscreen, mask and mechanical layers (free items; w line width, h text height)
Top Overlay:
  drawing of 10 lines, arcs and shapes, not listed
  text "GND" at 82.55,79.404 h2.5
  text "BauhallenUhr_V2.0 / Manuel Hueppi / 26.08.2026" at 22.225,76.2 h2
  text "+3.3V" at 84.455,72.419 h2.5
  text "Brightness -  / Sensor: J4/ J5" at 33.655,70.485 h2.5
  text "EN" at 97.79,68.58 h2.5
  text "ESP USB" at 15.875,65.434 h2.5
  text "VOUT" at 70.485,62.894 h2.5
  text "USB to UART" at 15.877,33.049 h2.5
  text "BOOT" at 97.79,31.779 h2.5
  text "+12V - Power" at 34.925,29.239 h2.5
  text "Servo" at 57.145,27.334 h2.5
Bottom Overlay:
  drawing of 70 lines, arcs and shapes, not listed
  text "LED - Matrices:" at 44.45,82.574 h2
  text "6" at 40.376,80.028 h1.52
  text "4" at 42.94,80.01 h1.52
  text "5" at 40.389,78.123 h1.52
  text "3" at 42.925,78.123 h1.52
  text "9" at 32.755,76.218 h1.52
  text "7" at 35.299,76.2 h1.52
  text "8" at 32.76,74.313 h1.52
  text "12" at 35.56,74.295 h1.52
  text "10" at 40.64,72.408 h1.52
  text "2" at 42.926,72.4 h1.52
  text "11" at 40.64,70.485 h1.52
  text "1" at 42.844,70.485 h1.52
  text "+5V" at 41.656,64.799 h2.5
  text "+12V" at 25.4,60.706 h2.5
Mechanical 13:
  the board outline again, w0.254

## Text inside footprints (layer, text, board x,y; h text height)
J2: Mechanical 13 "PCB EDGE" at 11.47,36 h0.41 r270
J3: Mechanical 13 "PCB EDGE" at 11.47,52.26 h0.41 r270
J4: Mechanical 13 "PCB Edge" at 45.085,84.455 h0.81